# EAGLE board power (EAGLE 6.0)
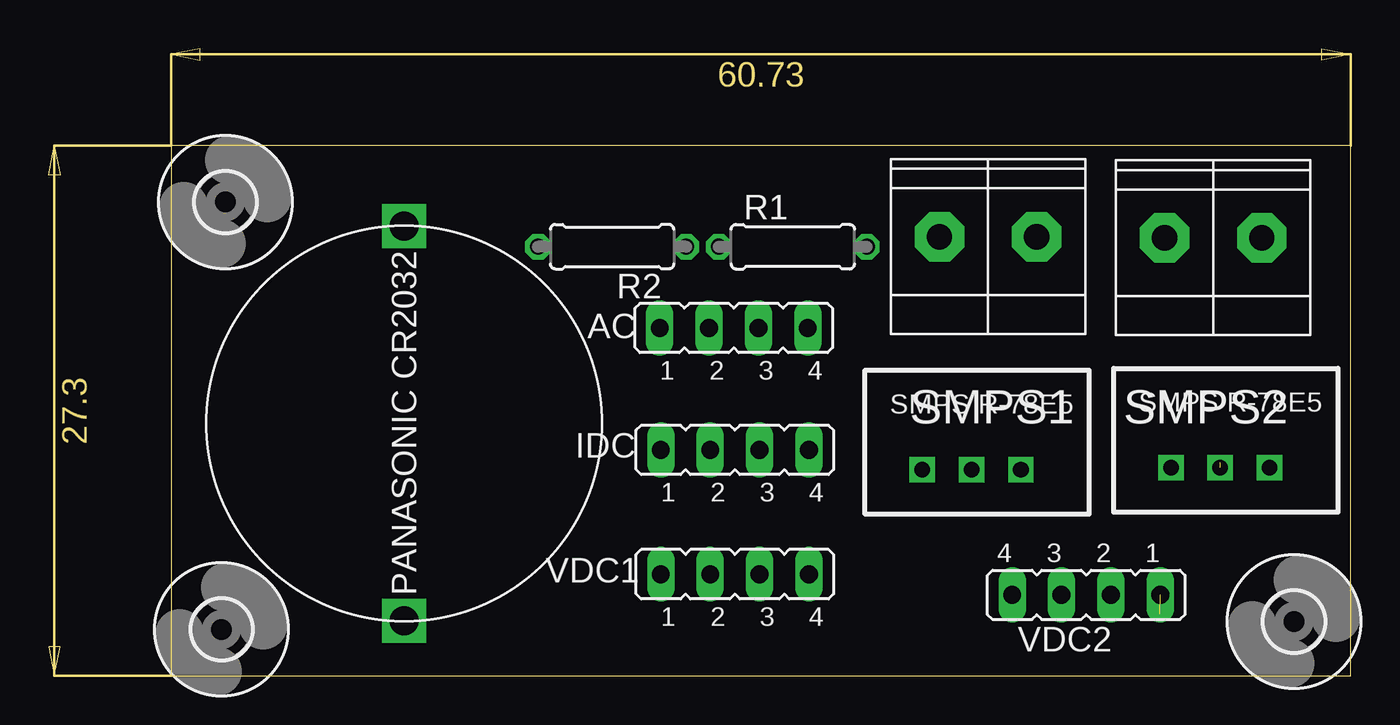
[diagram p0: board, top side]
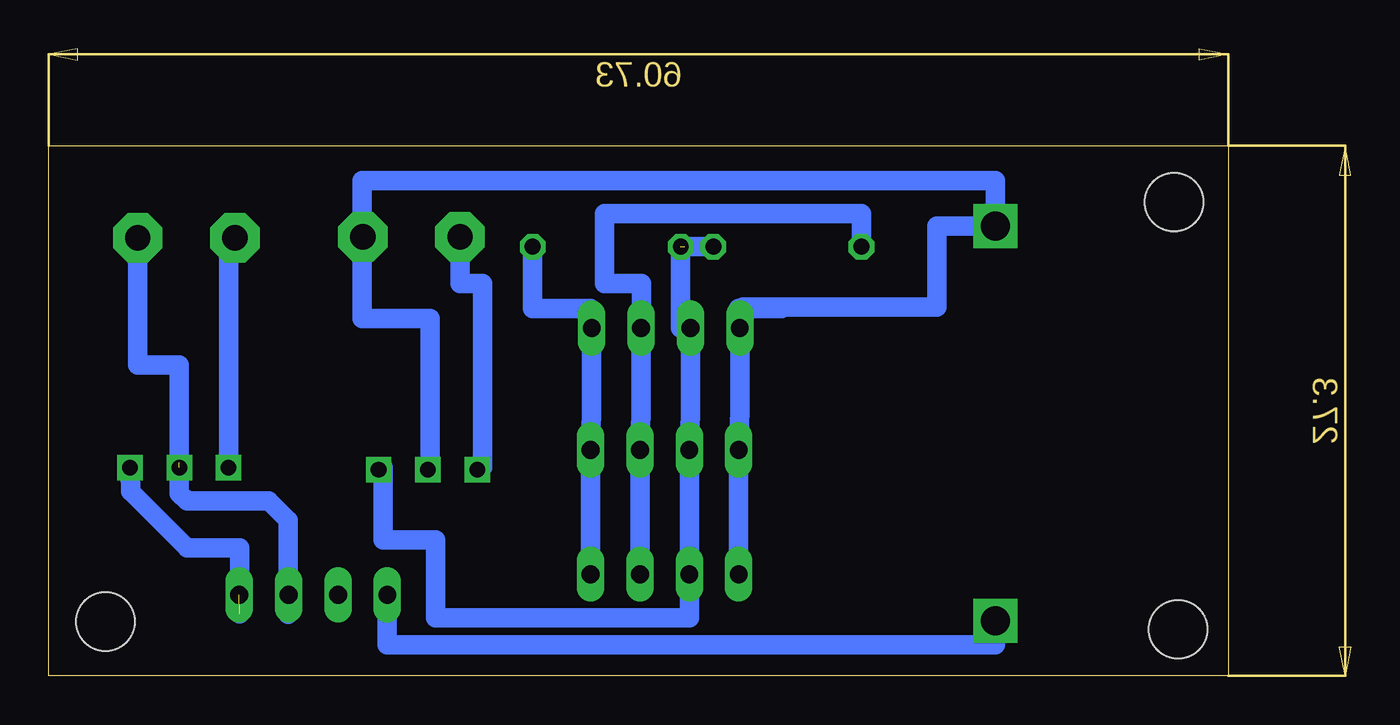
[diagram p1: board, bottom side, seen from below]

Size 60.73 x 27.3 mm. Coordinates in mm from the lower left corner, seen from the top.
Outline: 0,0 60.73,0 60.73,27.3 0,27.3 0,0
Copper layers (1*16): Top 0.035mm / dielectric 1.5mm / Bottom 0.035mm
Design rules: minimum track width 10mil, minimum drill 24mil, track to track 12mil, track to pad 12mil, pad to pad 12mil, via to via 12mil, smd to smd 12mil, copper to edge 40mil, drill to drill 8mil, minimum pad ring 10mil, minimum via ring 8mil, stop-mask expansion 4mil, vias tented up to drill 0mil, thermal gap 10mil

## Footprints (pad centres in the part's own frame; a part is rotated, then mirrored left to right if it is on the bottom)
JP4 = drill 0.914 long: 1 -3.81,0; 2 -1.27,0; 3 1.27,0; 4 3.81,0
0207/7 = drill 0.813 octagon: 1 -3.81,0; 2 3.81,0
CTB1500-2 = drill 1.3 pad 2.54 octagon: P$1 -2.5,0.5; P$2 2.5,0.5
PANASONIC_CR2032 = drill 1.5 square: GND -10.16,0; VB 10.16,0
SMPS_R-78E5 = drill 0.8 square: GND 0,-1.27; VIN -2.54,-1.27; VOUT 2.54,-1.27
3,0 = hole 3: 0,0

## Placement (x,y rotation side)
AC  [JP4]  28.96,17.91 0 top
IDC  [JP4]  29.02,11.64 0 top
R1  [0207/7]  32,22.1 0 top
R2  [0207/7]  22.7,22.1 180 top
U$1  CTB1500/2  [CTB1500-2]  53.64,22.05 0 top
U$2  CTB1500/2  [CTB1500-2]  42.05,22.11 0 top
U$3  PANASONIC_CR2032  [PANASONIC_CR2032]  12,13 270 top
U$4  SMPS_R-78E5  [SMPS_R-78E5]  54,12 0 top
U$5  SMPS_R-78E5  [SMPS_R-78E5]  41.2,11.9 0 top
U$6  [3,0]  2.8,24.4 0 top
U$7  [3,0]  2.6,2.4 0 top
U$8  [3,0]  57.8,2.8 0 top
VDC1  [JP4]  29.02,5.24 0 top
VDC2  [JP4]  47.1,4.17 180 top

## Library data of the parts
AC IDC VDC1 VDC2 = jumper
R1 R2 = resistor
U$1 U$2 = eko-parts
U$3-U$5 = Datalogging_Custom_Parts
U$6-U$8 = holes

## Nets
+5V/1: AC.2 IDC.2 R1.1 R2.1 U$5.VOUT VDC1.2
+5V/2: U$4.VOUT VDC2.1
+12V/1: U$2.P$1 U$5.VIN
+12V/2: U$1.P$1 U$4.VIN
GND1: AC.1 IDC.1 U$2.P$2 U$3.GND U$5.GND VDC1.1
GND2: U$1.P$2 U$4.GND VDC2.2
SCL: AC.4 IDC.4 R1.2 VDC1.4
SDA: AC.3 IDC.3 R2.2 VDC1.3
VB: U$3.VB VDC2.4

## Tracks (layer width: path | path; a pad name or v marks a point on that pad's centre or on a via)
+5V/1  (1 unrouted)
  Bottom 1.016: AC.2 27.75,17.91 | AC.2 27.69,13.64 IDC.2 VDC1.2 27.75,3 40.8,3 40.8,7 43.5,7 43.5,10.73 U$5.VOUT | R2.1 28,22.1 28,22 | AC.2 28.19,17.91 R1.1
+5V/2  (1 unrouted)
  Bottom 1.016: U$4.VOUT 56.5,9.73 56.5,9.5 53.6,6.6 50.9,6.6 50.9,3.2
+12V/1
  Bottom 1.016: U$5.VIN 38.4,10.73 38.4,20.2 39.55,20.2 U$2.P$1
+12V/2
  Bottom 1.016: U$1.P$1 51.46,22.75 U$4.VIN
GND1
  Bottom 1.016: VDC1.1 IDC.1 25.15,13.64 AC.1 25.21,18.91 23,18.91 23,19 | 23,19 15,19 15,23.16 U$3.GND 12,25.5 44.6,25.5 44.6,22.7 | 23,19 25,19 | U$5.GND 41.1,10.73 41.1,18.4 44.6,18.4 44.6,22.7 | 44.6,22.7 44.55,22.7 U$2.P$2
GND2  (1 unrouted)
  Bottom 1.016: U$4.GND 54,9.73 | U$1.P$2 56.14,16 54,16 54,11 | VDC2.2 48.4,3.17 48.4,8 49.4,9 53.6,9 54,9.4 U$4.GND | 54,9.8 U$4.GND
SCL
  Bottom 1.016: VDC1.4 IDC.4 32.77,13.64 AC.4 32.83,18.91 35.81,18.91 R1.2
SDA
  Bottom 1.016: AC.3 30.29,17.91 | VDC1.3 IDC.3 30.23,13.64 AC.3 | AC.3 30.2,17.91 30.2,20.2 32.1,20.2 32.1,23.8 18.89,23.8 R2.2
VB
  Bottom 1.016: VDC2.4 43.3,3.17 43.3,1.6 12,1.6 U$3.VB

## Text on the board
tPlace: SMPS1 | SMPS2